# Altium PCB SENSORS.PcbDoc
Units mil, origin at the board's own origin, x right, y up, seen from the top; angles counter-clockwise.
Board outline 850 x 765 mil, 2 copper layers (Top Layer, Bottom Layer); 2 components, 3 nets, 12 pads, 0 vias.
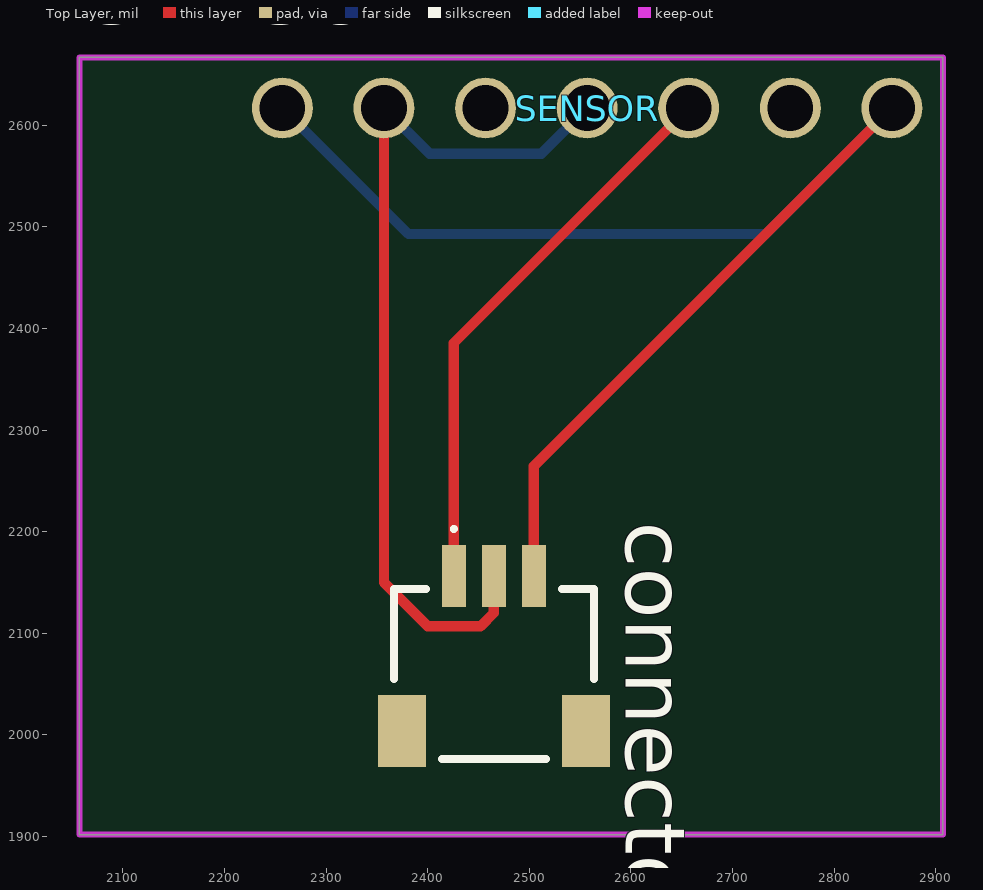
[diagram p0: Top Layer view]
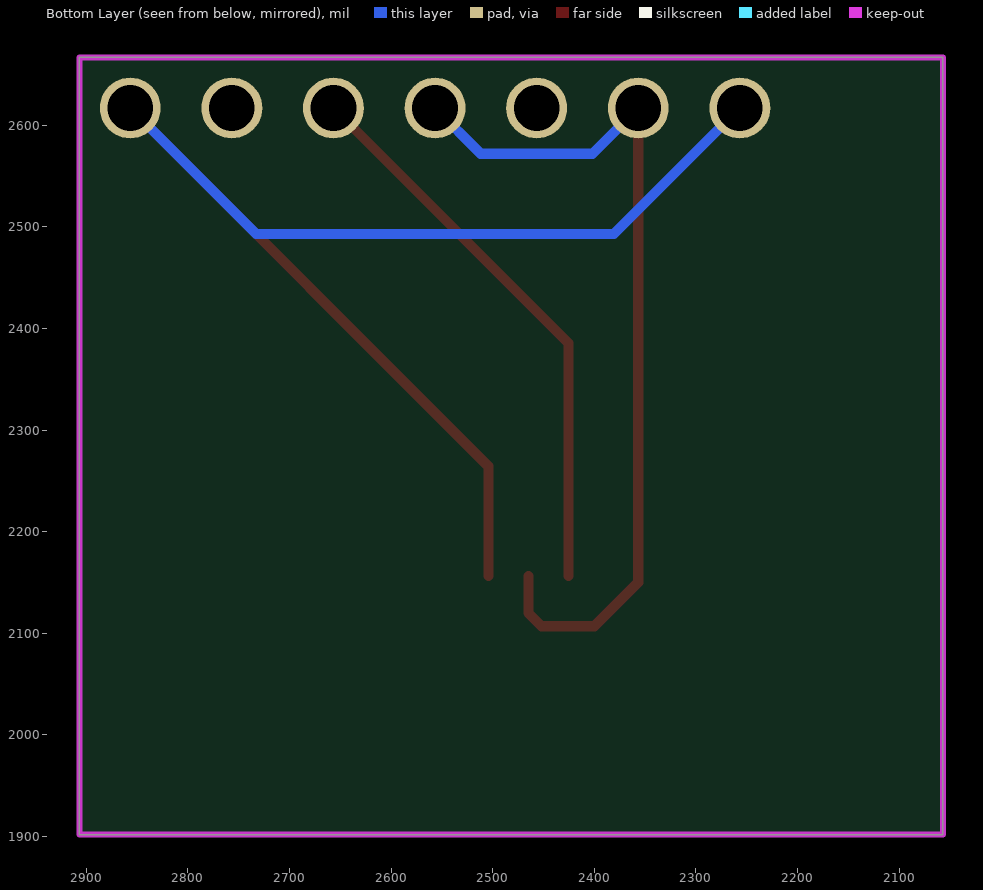
[diagram p1: Bottom Layer view, seen from below]

## Layer stack, top to bottom
Top Solder: solder mask 0.4, Solder Resist, Dk 3.5
Top Layer: signal copper 1.4
Dielectric 1: dielectric 12.6, FR-4, Dk 4.8
Bottom Layer: signal copper 1.4
Bottom Solder: solder mask 0.4, Solder Resist, Dk 3.5

## Board outline
2057,1902 2907,1902 2907,2667 2057,2667

## Design rules (kind name [scope] priority, off if disabled: settings)
Clearance [All] p1: gap=10 ignorepadtopadclearanceinfootprint=FALSE except(0: Arc-Hole Track-Hole SMDPad-Hole THPad-Hole Via-Hole Fill-Hole Poly-Hole Region-Hole Text-Hole)
PolygonConnect [All] p1: connectstyle=Relief reliefconductorwidth=10 reliefentries=4 polygonreliefangle="90 Angle" airgapwidth=10
RoutingVias [All] p1: holewidth=28 width=50 viastyle="Through Hole" minholewidth=28 minwidth=50 maxholewidth=28 maxwidth=50
SolderMaskExpansion [All] p1: expansion=4 istentingtop=FALSE
Width [All] p1: maxlimit=10 minlimit=10 preferedwidth=10
30 further rules are at their usual default settings.

## Components (designator, comment, footprint, x,y, rotation, side; value= is the part's Value field where it differs from the comment)
connector "SM03B-SRSS-TB(LF)(SN)" JST-SM03B-SRSS-TB_V 2465,2060 r0 top
SENSOR "LV-MaxSonar-EZ-1010" LV-MaxSonar-EZ-1010-Footprint-1 2256.84,2617.06 r0 top

## Footprints (in the part's own frame and the unit in brackets; to place one, negate y for a bottom-side part, rotate by r counter-clockwise, add the part's x,y. Pads: shape width x height; smd on the part's side, far side on the other; paste and mask are expansions set on the pad)
JST-SM03B-SRSS-TB_V [mm] "SMD, 3-Leads, Body 5x4.25mm, Pitch 1mm"
  rect 0.6x1.55 smd: 1(-1,2.45) 2(0,2.45) 3(1,2.45)
  rect 1.2x1.8 smd: MP1(-2.3,-1.425) MP2(2.3,-1.425)
  silkscreen extent -2.5,-2.13 2.5,3.67, body extent -2.5,-2.12 2.5,2.83, height 3.25
LV-MaxSonar-EZ-1010-Footprint-1 [mil]
  round 60 hole 45: 1(0,0) 2(100,0) 3(200,0) 4(300,0) 5(400,0) 6(500,0) 7(600,0)

## Part data
connector: library part CMP-2000-07077-1, "Male Header, Pitch 1 mm, 1 x 3 Position, Height 2.9 mm, -25 to 85 degC, RoHS, Tape and Reel", Manufacturer=JST, Package Description="Male Header, Pitch 1 mm, 1 x 3 Position, Height 2.9 mm", Package Reference=SM03B-SRSS-TB, Datasheet URL=https://datasheet.ciiva.com/26894/getdatasheetpartid-708885-26894671.pdf, Datasheet Version=11/2010, Manufacturer URL=http://www.jst.com/home2.html, Mounting Technology=SurfaceMount, No of Positions=3, Pitch=1mm, Style/Orientation=RightAngleHeader/Plug, Termination=Crimp, Type=ShroudedHeader
SENSOR: library part CMP-00003-2, "Ultrasonic sensor"

## Nets (pads, with @x,y where several pads share a name; then routed paths per layer and width w, separated by ;. In a path a pad name is that pad's centre, name@x,y a point inside that pad or via, vN(x,y) a via of type N, cw(c..) or ccw(c..) an arc to the next point about the centre after c; other vN are vias at no path point)
5V: connector.2 SENSOR.2 SENSOR.4 | length 872.1
  Top Layer w10: SENSOR.2 2356.84,2150.16 2400,2107 2452,2107 2465,2120 connector.2
  Bottom Layer w10: SENSOR.2 2401.9,2572 2511.78,2572 SENSOR.4
GND: connector.3 SENSOR.1 SENSOR.7 | length 1309.4
  Top Layer w10: connector.3 2504.37,2264.59 SENSOR.7
  Bottom Layer w10: SENSOR.1 2380.9,2493 2732.78,2493 SENSOR.7
VDistance: connector.1 SENSOR.5 | length 556.4
  Top Layer w10: connector.1 2425.63,2385.85 SENSOR.5
pads on no net: connector.MP1 connector.MP2 SENSOR.3 SENSOR.6

## Keep-outs
Keep-Out Layer:
  the board outline again, w5.91